# Altium PCB CorgPassRev1.PcbDoc (part 1 of 2)
Units mm, origin at the board's own origin, x right, y up, seen from the top; angles counter-clockwise.
Board outline 25 x 75 mm, 4 copper layers (Top Layer, Plane (GND), Plane (3V3), Bottom Layer), stack 1.57 mm thick; 40 components, 42 nets, 191 pads, 69 vias.
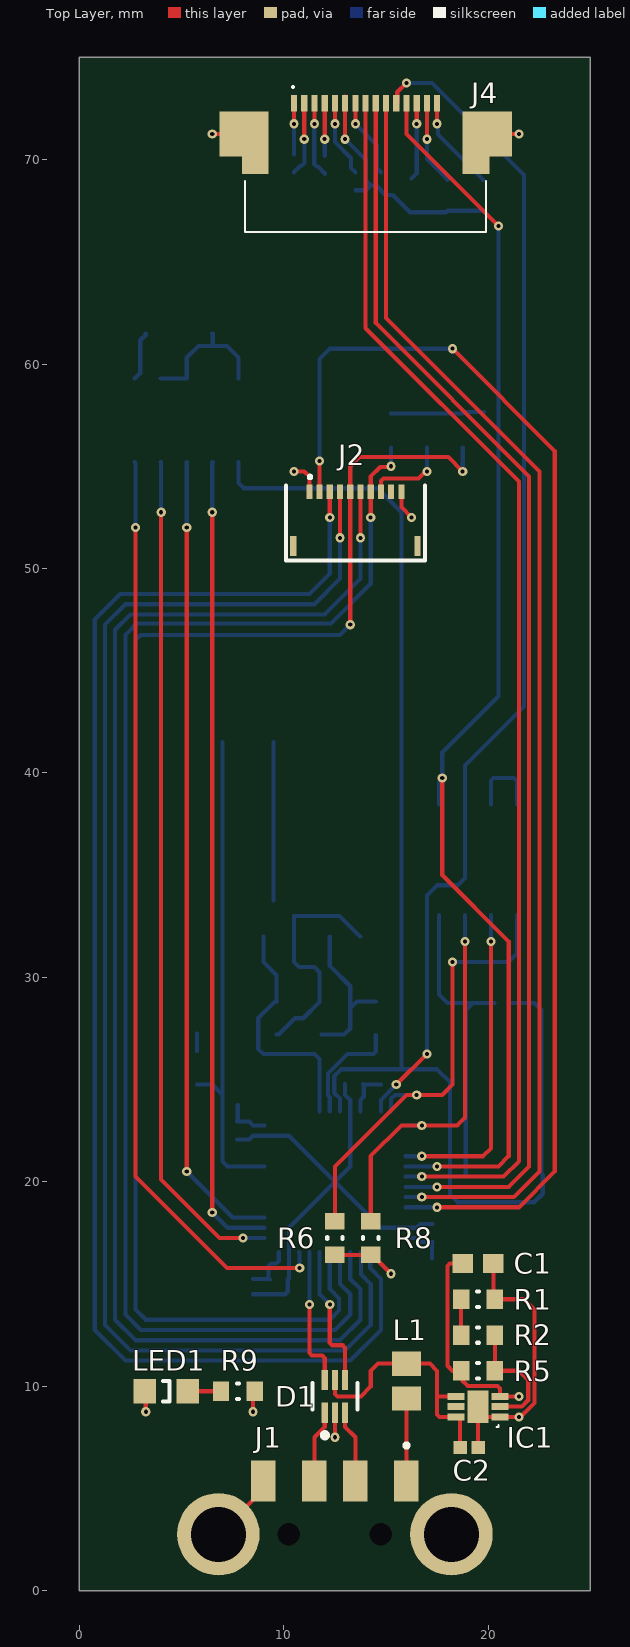
[diagram p0: Top Layer view]
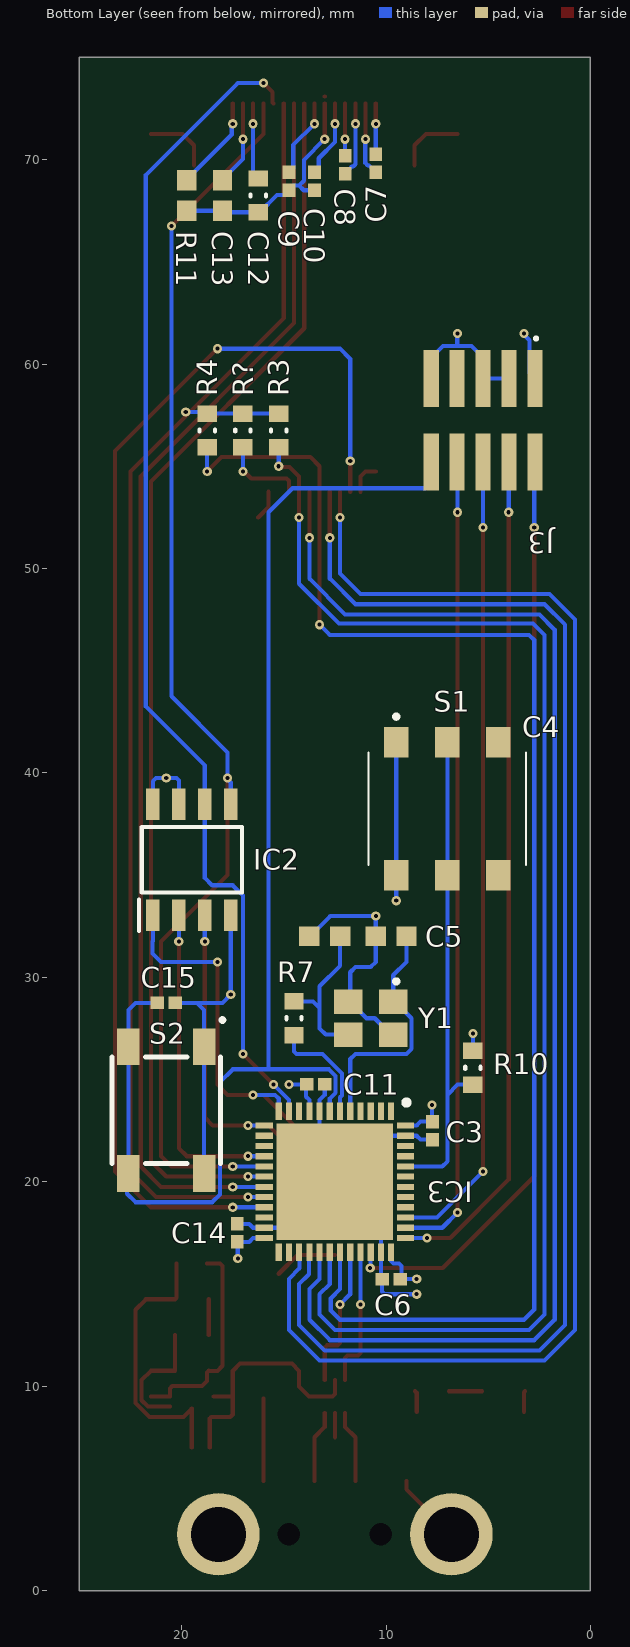
[diagram p1: Bottom Layer view, seen from below]
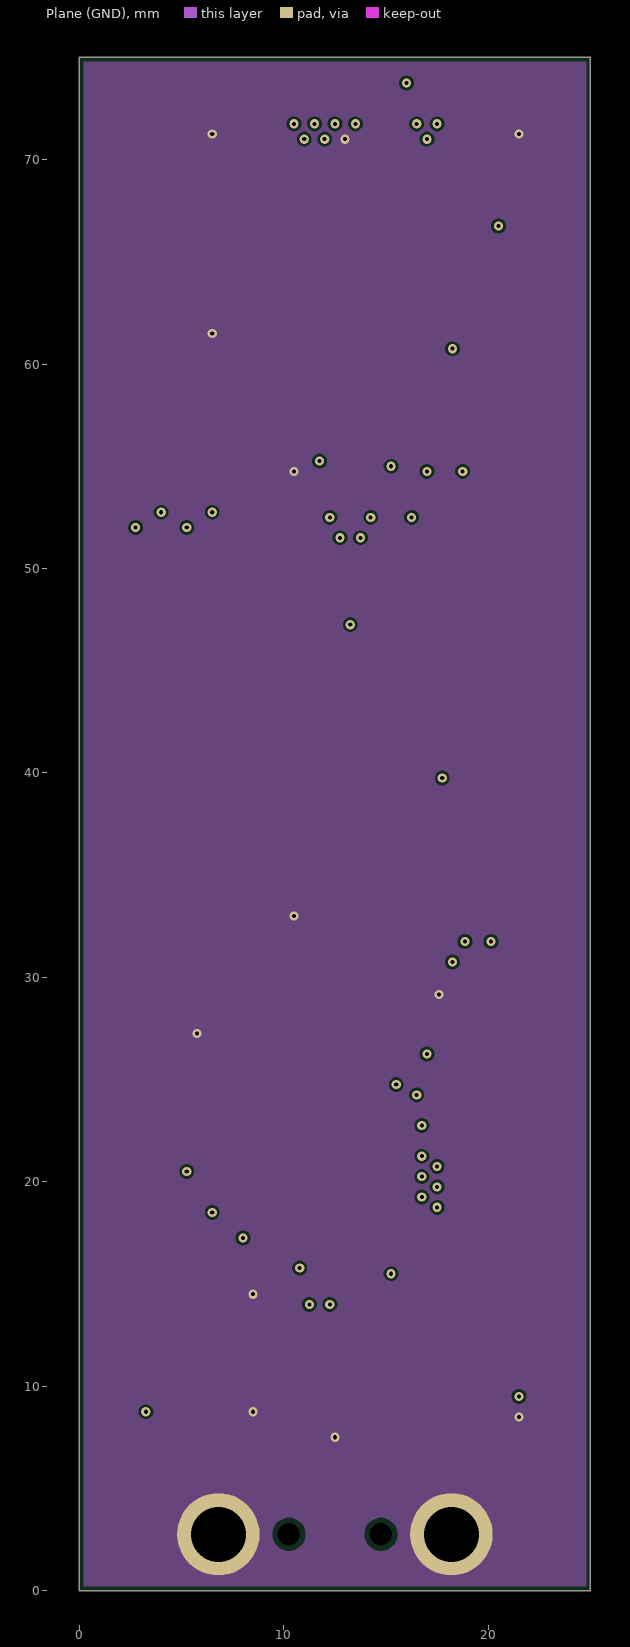
[diagram p2: Plane (GND)]
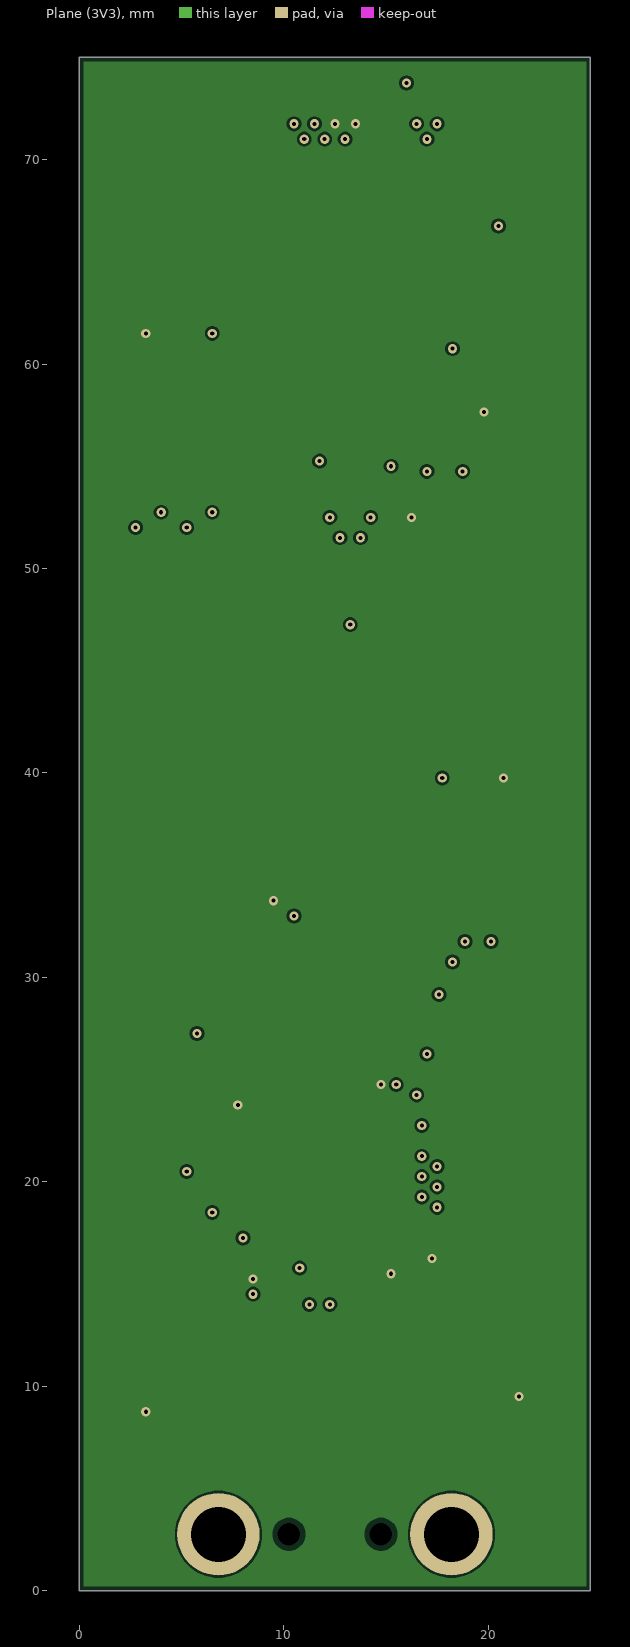
[diagram p3: Plane (3V3)]
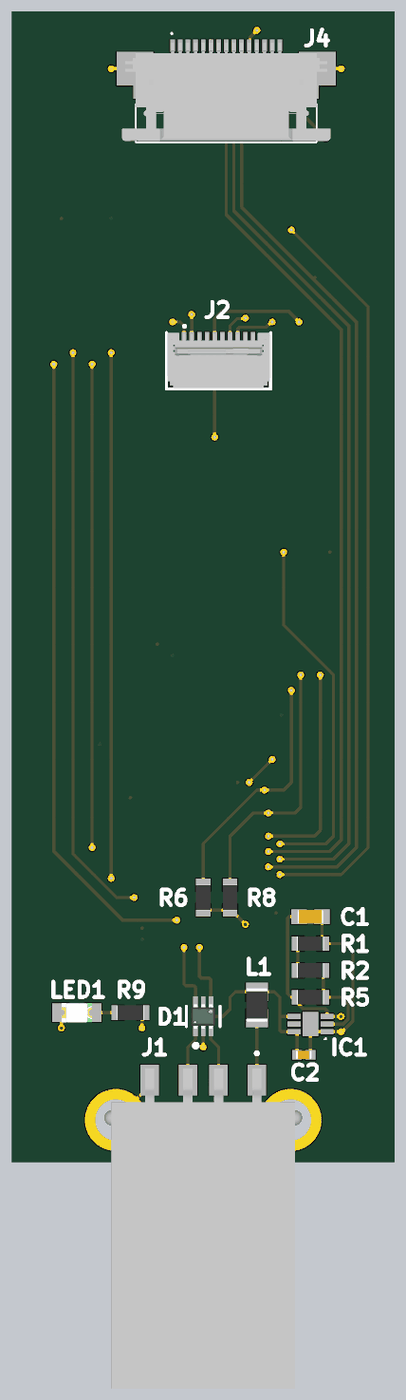
[diagram p4: 3D render of the assembled board from above, using the file's embedded part models]
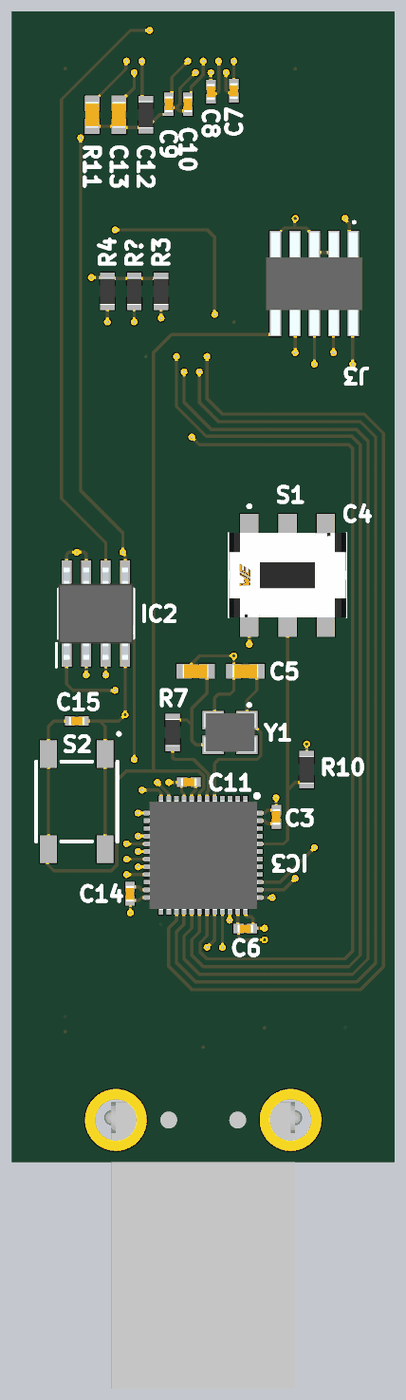
[diagram p5: 3D render of the assembled board from below, using the file's embedded part models]

## Layer stack, top to bottom
Top Solder: solder mask 0.0102, Solder Resist, Dk 3.5
Top Layer: signal copper 0.035
Dielectric 2: prepreg 0.2, PP-006, Dk 4.1
Plane (GND): signal copper 0.0175
Dielectric 1: dielectric 1.065, FR-4, Dk 4.8
Plane (3V3): signal copper 0.0175
Dielectric 3: prepreg 0.2, PP-006, Dk 4.1
Bottom Layer: signal copper 0.035
Bottom Solder: solder mask 0.0102, Solder Resist, Dk 3.5

## Board outline
0,0 25,0 25,75 0,75

## Design rules (kind name [scope] priority, off if disabled: settings)
BoardOutlineClearance [All] p1: gap=0.2 ignorepadtopadclearanceinfootprint=FALSE
Clearance [All] p1: gap=0.102 ignorepadtopadclearanceinfootprint=FALSE except(0.127: Arc-Via Track-Via SMDPad-Via THPad-Via Via-Via Via-Fill Via-Poly Via-Region Via-Text; 0.25: Arc-Hole Track-Hole SMDPad-Hole THPad-Hole Via-Hole Fill-Hole Poly-Hole Region-Hole Text-Hole)
ComponentClearance [All] p1: gap=0.102 collisioncheckmode=3 verticalgap=0.102 showdistances=TRUE
DiffPairsRouting [All] p1: maxlimit=0.102 minlimit=0.102 mostfreqgap=0.102 toplayer_minwidth=0.102 toplayer_maxwidth=1816.048 toplayer_prefwidth=0.102 midlayer1_minwidth=0.102 midlayer1_maxwidth=1816.048 midlayer1_prefwidth=0.102 midlayer2_minwidth=0.102 midlayer2_maxwidth=1816.048 midlayer2_prefwidth=0.102 bottomlayer_minwidth=0.102 bottomlayer_maxwidth=1816.048 bottomlayer_prefwidth=0.102 maxuncoupledlength=12.7
Height [All] p1: minheight=0 maxheight=1816.048 prefheight=12.7
HoleSize [All] p1: absolutevalues=TRUE maxlimit=6.3 minlimit=0.2 maxpercent=80.000 minpercent=20.000
HoleToHoleClearance [All] p1: gap=0.25 allowstackedmicrovias=FALSE
MinimumAnnularRing [All] p1: minimumring=0.076
MinimumSolderMaskSliver [All] p1: minsoldermaskwidth=0
PlaneClearance [All] p1: clearance=0.102
PlaneConnect PlaneConnect_3V3 [InNetClass('3V3')] p1: planeconnectstyle=Direct reliefexpansion=0.3 reliefentries=4 reliefconductorwidth=0.102 reliefairgap=0.102
PlaneConnect PlaneConnect_GND [InNetClass('GND')] p2: planeconnectstyle=Direct reliefexpansion=0.508 reliefentries=4 reliefconductorwidth=0.254 reliefairgap=0.254
PlaneConnect [All] p3: pad.planeconnectstyle=Relief pad.reliefexpansion=0.3 pad.reliefentries=4 pad.reliefconductorwidth=0.102 pad.reliefairgap=0.102 via.planeconnectstyle=Direct via.reliefexpansion=0.3 via.reliefentries=4 via.reliefconductorwidth=0.127 via.reliefairgap=0.127
PolygonConnect PolygonConnect_3V3 [All vs InNetClass('3V3')] p1: connectstyle=Direct reliefconductorwidth=0.254 reliefentries=4 polygonreliefangle="90 Angle" airgapwidth=0.254
PolygonConnect PolygonConnect_GND [All vs InNetClass('GND')] p2: connectstyle=Direct reliefconductorwidth=0.254 reliefentries=4 polygonreliefangle="90 Angle" airgapwidth=0.254
PolygonConnect [All] p3: thpad.connectstyle=Relief thpad.reliefconductorwidth=0.102 thpad.reliefentries=4 thpad.polygonreliefangle="90 Angle" thpad.airgapwidth=0.102 smdpad.connectstyle=Relief smdpad.reliefconductorwidth=0.102 smdpad.reliefentries=4 smdpad.polygonreliefangle="90 Angle" smdpad.airgapwidth=0.102 via.connectstyle=Direct via.reliefconductorwidth=0.127 via.reliefentries=4 via.polygonreliefangle="90 Angle" via.airgapwidth=0.127
RoutingVias [All] p1: holewidth=0.2 width=0.45 viastyle="Through Hole" minholewidth=0.2 minwidth=0.45 maxholewidth=6.3 maxwidth=6.55
SilkToSilkClearance [All] p1: silktosilkclearance=0
SilkToSolderMaskClearance [IsPad] p1: minsilkscreentomaskgap=0.102 clearancetoexposedcopper=TRUE
SolderMaskExpansion [All] p1: expansion=0.075 istentingtop=FALSE
Width [All] p1: maxlimit=1816.048 minlimit=0.102 preferedwidth=0.204 minimp=50.000000 maximp=50.000000 favimp=50.000000
20 further rules are at their usual default settings.

## Classes and differential pairs
net class GND: GND
net class 3V3: 3V3

## Components (designator, comment, footprint, x,y, rotation, side; value= is the part's Value field where it differs from the comment)
C1 "4.7uF" CL10A475KQ8NNNC 19.5,16 r0 top
C2 "Cap" CL05A105KQ5NNNC 19.06,7 r180 top value=1uF
C3 "Cap" CL05B104KQ5NNNC 7.723,22.5 r90 bottom value=100nF
C4 "Cap" CL10C120JB81PNC 13,32 r180 bottom value=12pF
C5 "Cap" CL10C120JB81PNC 9.75,32 r180 bottom value=12pF
C6 "Cap" CL05B104KQ5NNNC 9.75,15.223 r0 bottom value=100nF
C7 "Cap" CL05A105KQ5NNNC 10.5,69.81 r90 bottom value=1uF
C8 "Cap" CL05A105KQ5NNNC 12,69.75 r90 bottom value=1uF
C9 "Cap" CL05A105KQ5NNNC 14.75,68.94 r90 bottom value=1uF
C10 "Cap" CL05A105KQ5NNNC 13.5,68.94 r90 bottom value=1uF
C11 "Cap" CL05B104KQ5NNNC 13.44,24.777 r0 bottom value=100nF
C12 "Cap" CL10A225KA8NNNC 19.75,68.25 r90 bottom value=2.2uF
C13 "Cap" CL10A225KA8NNNC 18,68.25 r270 bottom value=2.2uF
C14 "Cap" CL05B104KQ5NNNC 17.277,17.5 r90 bottom value=100nF
C15 "Cap" CL05B104KQ5NNNC 20.75,28.75 r180 bottom value=100nF
D1 "USBLC6-2P6" FP-SOT-666-MFG 12.5,9.5 r90 top
IC1 "LDL212PVR" LDL212PVR 19.5,9 r180 top
IC2 "M95M04-DRMN6TP" SOIC127P600X175-8N 19.5,35.75 r90 bottom
IC3 "STM32L443CCU6" QFN50P700X700X60-49N-D 12.5,20 r270 bottom
J1 "1734028-1" 117340281 12.5,-4.5 r0 top
J2 "503480-1000" 5034801000 13.5,54.05 r0 top
J3 "FTSH-105-01-L-DV-K-TR" FTSH10501LDVKTR 5.25,57.25 r0 bottom
J4 "52745-1597" 527451597 14,72.75 r0 top
L1 "100MHz @ 600" 742792040 16,10.25 r270 top
LED1 "150080RS75000" 0805_A 4.25,9.75 r180 top
R1 "Res2" ERJ-UP3F20R0V 19.5,14.25 r0 top value=20
R2 "Res2" ERJ-UP3F1002V 19.5,12.5 r180 top value=10k
R3 "Res2" ERJ-UP3F1002V 15.25,56.75 r270 bottom value=10k
R4 "Res2" ERJ-UP3F1002V 18.75,56.75 r270 bottom value=10k
R5 "Res2" ERJ-UP3F1802V 19.5,10.752 r0 top value=18k
R6 "Res2" ERJ-UP3F1002V 12.5,17.25 r270 top value=10k
R7 "Res2" ERJ-UP3J470V 14.5,28 r270 bottom value=47
R8 "Res2" ERJ-UP3F1002V 14.25,17.25 r90 top value=10k
R9 "Res2" ERJ-UP3F1001V 7.75,9.75 r180 top value=1k
R10 "Res2" ERJ-UP3F1002V 5.75,25.575 r90 bottom value=10k
R11 "Res2" ERJ-UP3F3903V 16.25,68.25 r90 bottom value=390k
R? "Res2" ERJ-UP3F1002V 17,56.75 r270 bottom value=10k
S1 "452403012014" 452403012014 7,38.25 r180 bottom
S2 "SKQGAKE010" SKQGAKE010 20.75,23.5 r270 bottom
Y1 "NX3225SA-16.000000MHZ-T1" NX3225SA16000000MHZT1 10.75,28 r0 bottom

## Footprints (in the part's own frame and the unit in brackets; to place one, negate y for a bottom-side part, rotate by r counter-clockwise, add the part's x,y. Pads: shape width x height; smd on the part's side, far side on the other; paste and mask are expansions set on the pad)
0805_A [mm] "Chip LED, 2-Leads, Body 2.0x1.3mm, IPC Medium Density"
  rect 1.1x1.2 smd: 1(-1.05,0) 2(1.05,0)
  silkscreen extent -0.15,-0.5 0.15,0.5, body extent -1,-0.62 1,0.63, height 0.68
117340281 [mm]
  rect 1.2x2 smd: 1(3.5,9.855) 2(1,9.855) 3(-1,9.855) 4(-3.5,9.855)
  round 4.035 hole 2.69: MH1(-5.7,7.255) MH2(5.7,7.255)
  round 0.55 hole 1.1 unplated: MH3(-2.25,7.255) MH4(2.25,7.255)
  silkscreen extent 3.4,11.5 3.6,11.7, body extent -6.45,-10.25 6.45,10.6, height 3.21
527451597 [mm]
  rect 0.3x0.8 smd: 1(-3.5,0) 2(-3,0) 3(-2.5,0) 4(-2,0) 5(-1.5,0) 6(-1,0) 7(-0.5,0) 8(0,0) 9(0.5,0) 10(1,0) 11(1.5,0) 12(2,0) 13(2.5,0) 14(3,0) 15(3.5,0)
  rect 2.4x2.2 smd: AMP1(-5.95,-1.5) AMP2(5.95,-1.5)
  rect 1.3x0.85 smd: BMP1(-5.4,-3.025) BMP2(5.4,-3.025)
  silkscreen extent -5.9,-6.3 5.9,0.85, body extent -6.8,-6.2 6.8,0.2, height 2
742792040 [mm] "Chip Inductor, 2-Leads, Body 2.00x1.20mm, IPC Medium Density"
  rect 1.19x1.42 smd: 1(-0.855,0) 2(0.855,0)
  body extent -1.1,-0.7 1.1,0.7, height 0.9
5034801000 [mm]
  rect 0.3x0.7 smd: 1(-2.25,-0.3) 2(-1.75,-0.3) 3(-1.25,-0.3) 4(-0.75,-0.3) 5(-0.25,-0.3) 6(0.25,-0.3) 7(0.75,-0.3) 8(1.25,-0.3) 9(1.75,-0.3) 10(2.25,-0.3)
  rect 0.3x1 smd: 11(-3.04,-2.95) 12(3.04,-2.95)
  silkscreen extent -3.4,-3.66 3.4,0.48, body extent -3.35,-3.61 3.35,-0.01, height 1.88
452403012014 [mm]
  rect 1.2x1.5 smd: 1(-2.5,3.25) 2(0,3.25) 3(2.5,3.25) 4(-2.5,-3.25) 5(0,-3.25) 6(2.5,-3.25)
  silkscreen extent -3.85,-2.75 3.85,4.6, body extent -3.85,-2.75 3.85,2.75, height 3.2
CL05A105KQ5NNNC [mm] "Chip Capacitor, 2-Leads, Body 1.00x0.50mm, IPC Medium Density"
  rect 0.66x0.62 smd: 1(-0.44,0) 2(0.44,0)
  body extent -0.53,-0.28 0.53,0.28, height 0.55
CL05B104KQ5NNNC [mm] "Chip Capacitor, 2-Leads, Body 1.00x0.50mm, IPC Medium Density"
  rect 0.66x0.62 smd: 1(-0.44,0) 2(0.44,0)
  body extent -0.53,-0.28 0.53,0.28, height 0.55
CL10A225KA8NNNC [mm] "Chip Capacitor, 2-Leads, Body 1.60x0.80mm, IPC Medium Density"
  rect 1x0.95 smd: 1(-0.75,0) 2(0.75,0)
  body extent -0.85,-0.45 0.85,0.45, height 0.9
CL10A475KQ8NNNC [mm] "Chip Capacitor, 2-Leads, Body 1.60x0.80mm, IPC Medium Density"
  rect 1x0.95 smd: 1(-0.75,0) 2(0.75,0)
  body extent -0.85,-0.45 0.85,0.45, height 0.9
CL10C120JB81PNC [mm] "Chip Capacitor, 2-Leads, Body 1.60x0.80mm, IPC Medium Density"
  rect 1x0.95 smd: 1(-0.75,0) 2(0.75,0)
  body extent -0.85,-0.45 0.85,0.45, height 0.9
ERJ-UP3F20R0V [mm] "Chip Resistor, 2-Leads, Body 1.60x0.85mm, IPC Medium Density"
  rect 0.8x0.95 smd: 1(-0.825,0) 2(0.825,0)
  silkscreen extent -0.05,-0.38 0.05,0.38, body extent -0.87,-0.48 0.87,0.48, height 0.55
ERJ-UP3F1001V [mm] "Chip Resistor, 2-Leads, Body 1.60x0.85mm, IPC Medium Density"
  rect 0.8x0.95 smd: 1(-0.825,0) 2(0.825,0)
  silkscreen extent -0.05,-0.38 0.05,0.38, body extent -0.87,-0.48 0.87,0.48, height 0.55
ERJ-UP3F1002V [mm] "Chip Resistor, 2-Leads, Body 1.60x0.85mm, IPC Medium Density"
  rect 0.8x0.95 smd: 1(-0.825,0) 2(0.825,0)
  silkscreen extent -0.05,-0.38 0.05,0.38, body extent -0.87,-0.48 0.87,0.48, height 0.55
ERJ-UP3F1802V [mm] "Chip Resistor, 2-Leads, Body 1.60x0.85mm, IPC Medium Density"
  rect 0.8x0.95 smd: 1(-0.825,0) 2(0.825,0)
  silkscreen extent -0.05,-0.38 0.05,0.38, body extent -0.87,-0.48 0.87,0.48, height 0.55
ERJ-UP3F3903V [mm] "Chip Resistor, 2-Leads, Body 1.60x0.85mm, IPC Medium Density"
  rect 0.8x0.95 smd: 1(-0.825,0) 2(0.825,0)
  silkscreen extent -0.05,-0.38 0.05,0.38, body extent -0.87,-0.48 0.87,0.48, height 0.55
ERJ-UP3J470V [mm] "Chip Resistor, 2-Leads, Body 1.60x0.85mm, IPC Medium Density"
  rect 0.8x0.95 smd: 1(-0.825,0) 2(0.825,0)
  silkscreen extent -0.05,-0.38 0.05,0.38, body extent -0.87,-0.48 0.87,0.48, height 0.55
FP-SOT-666-MFG [mm]
  rect 0.99x0.3 smd paste+0 mask+0: 1(-0.805,0.5) 2(-0.805,0) 3(-0.805,-0.5) 4(0.805,-0.5) 5(0.805,0) 6(0.805,0.5)
  silkscreen extent -2.02,-1.1 0.65,1.1, body extent -1.4,-0.95 1.4,0.95, height 0.25
FTSH10501LDVKTR [mm]
  rect 0.74x2.79 smd: 1(-2.54,-2.035) 2(-2.54,2.035) 3(-1.27,-2.035) 4(-1.27,2.035) 5(0,-2.035) 6(0,2.035) 7(1.27,-2.035) 8(1.27,2.035) 9(2.54,-2.035) 10(2.54,2.035)
  silkscreen extent -2.64,-4.05 -2.54,-3.95, body extent -3.14,-3.36 3.14,3.36, height 6.15
LDL212PVR [mm]
  rect 0.85x0.35 smd: 1(-1.075,0.5) 2(-1.075,0) 3(-1.075,-0.5) 4(1.075,-0.5) 5(1.075,0) 6(1.075,0.5)
  rect 1.02x1.6 smd: 1(0,0)
  silkscreen extent -1,0.9 -0.9,1
NX3225SA16000000MHZT1 [mm]
  rect 1.4x1.2 smd: 1(-1.1,-0.8) 2(1.1,-0.8) 3(1.1,0.8) 4(-1.1,0.8)
  silkscreen extent -1.3,-1.85 -1.2,-1.75, body extent -1.68,-1.28 1.68,1.28, height 0.8
QFN50P700X700X60-49N-D [mm]
  rect 0.85x0.3 smd: 1(-3.45,2.75) 2(-3.45,2.25) 3(-3.45,1.75) 4(-3.45,1.25) 5(-3.45,0.75) 6(-3.45,0.25) 7(-3.45,-0.25) 8(-3.45,-0.75) 9(-3.45,-1.25) 10(-3.45,-1.75) 11(-3.45,-2.25) 12(-3.45,-2.75) 25(3.45,-2.75) 26(3.45,-2.25) 27(3.45,-1.75) 28(3.45,-1.25) 29(3.45,-0.75) 30(3.45,-0.25) 31(3.45,0.25) 32(3.45,0.75) 33(3.45,1.25) 34(3.45,1.75) 35(3.45,2.25) 36(3.45,2.75)
  rect 0.3x0.85 smd: 13(-2.75,-3.45) 14(-2.25,-3.45) 15(-1.75,-3.45) 16(-1.25,-3.45) 17(-0.75,-3.45) 18(-0.25,-3.45) 19(0.25,-3.45) 20(0.75,-3.45) 21(1.25,-3.45) 22(1.75,-3.45) 23(2.25,-3.45) 24(2.75,-3.45) 37(2.75,3.45) 38(2.25,3.45) 39(1.75,3.45) 40(1.25,3.45) 41(0.75,3.45) 42(0.25,3.45) 43(-0.25,3.45) 44(-0.75,3.45) 45(-1.25,3.45) 46(-1.75,3.45) 47(-2.25,3.45) 48(-2.75,3.45)
  rect 5.7x5.7 smd: 49(0,0)
  silkscreen extent -4,3.37 -3.75,3.62, body extent -3.55,-3.55 3.55,3.55, height 0.6
SKQGAKE010 [mm]
  rect 1.8x1.1 smd: 1(-3.1,1.85) 2(3.1,1.85) 3(-3.1,-1.85) 4(3.1,-1.85)
  silkscreen extent -4.47,-2.65 2.6,2.81
SOIC127P600X175-8N [mm]
  rect 1.525x0.65 smd: 1(-2.712,1.905) 2(-2.712,0.635) 3(-2.712,-0.635) 4(-2.712,-1.905) 5(2.712,-1.905) 6(2.712,-0.635) 7(2.712,0.635) 8(2.712,1.905)
  silkscreen extent -3.47,-2.45 1.6,2.58, body extent -3,-2.45 3,2.45, height 1.75

## Part data
C1: library part Cap, "Cap Ceramic 4.7uF 6.3V X5R 10% SMD 0603 85°C Paper T/R", Case Code (Imperial)=0603, Case Code (Metric)=1608, Dielectric=X5R, Manufacturer=Samsung, Manufacturer Part Number=CL10A475KQ8NNNC, Max Operating Temperature=85°C, Min Operating Temperature=-55°C, Package Quantity=1, Supplier Part Number 1=187-CL10A475KQ8NNNC, Tolerance=20%, Voltage=6.3V, Capacitance=4.7uF, Case/Package=0603, Category="Ceramic Capacitors", ComponentLink1Description=https://datasheet.ciiva.com/15195/getdatasheetpartid-358620-15195714.pdf?src-supplier=Verical, ComponentLink1URL=https://datasheet.ciiva.com/15195/getdatasheetpartid-358620-15195714.pdf?src-supplier=Verical, ComponentLink2Description=https://datasheet.ciiva.com/29198/457675-da-01-en-vs-kondensator-0603-29198672.pdf?src-supplier=Conrad, ComponentLink2URL=https://datasheet.ciiva.com/29198/457675-da-01-en-vs-kondensator-0603-29198672.pdf?src-supplier=Conrad, ComponentLink3Description=https://datasheet.ciiva.com/16437/cl05b104kq5nnnc-16437321.pdf?src-supplier=Future+Electronics, ComponentLink3URL=https://datasheet.ciiva.com/16437/cl05b104kq5nnnc-16437321.pdf?src-supplier=Future+Electronics, Construction=Flat, Contact Plating=Tin, Depth=0.8mm, Height=0.8mm, LatestRevisionDate=17-Jul-2002, LatestRevisionNote="Re-released for DXP Platform.", Length=1.6mm, Material=Ceramic, Mount="Surface Mount", PackageDescription="Radial Cap, Thru-Hole; 2 Leads; 0.3 in Pin Spacing", PackageReference=RAD-0.3, Packaging="Tape and Reel", Pricing 1="1=0.13000, 10=0.04700, 50=0.04700, 100=0.02100, 500=0.01500, 1000=0.01200, 4000=0.01000, 8000=0.00800, 10000=0.00800 (USD)", Published=8-Jun-2000, Publisher="Altium Limited", Radiation Hardening=No, RoHS=Yes, RoHS Compliant=Yes, Series=CL, Stock 1=199260, Supplier 1=Mouser, Thickness=0.035inch, Voltage Rating=6.3V, Width=0.031inch
C2 C7 C8 C9 C10: "Ceramic capacitor SMD-0402 1000nF /6.3V X5R# K +-10%, Samsung, RoHS", Capacitance=1uF, Case Code (Imperial)=0402, Case Code (Metric)=1005, Dielectric=X5R, Manufacturer=Samsung, Manufacturer Part Number=CL05A105KQ5NNNC, Max Operating Temperature=85°C, Min Operating Temperature=-55°C, Supplier Part Number 1=187-CL05A105KQ5NNNC, Tolerance=10%, Voltage=6.3V, Case/Package=0402, Category="Ceramic Capacitors", ComponentLink1Description=https://datasheet.ciiva.com/25709/cl05a105kq5nnnc-25709776.pdf?src-supplier=Digi-Key, ComponentLink1URL=https://datasheet.ciiva.com/25709/cl05a105kq5nnnc-25709776.pdf?src-supplier=Digi-Key, ComponentLink2Description=https://datasheet.ciiva.com/15195/getdatasheetpartid-358391-15195631.pdf?src-supplier=Verical, ComponentLink2URL=https://datasheet.ciiva.com/15195/getdatasheetpartid-358391-15195631.pdf?src-supplier=Verical, ComponentLink3Description=https://datasheet.ciiva.com/29198/459172-da-01-en-vs-kondensator-0402-29198343.pdf?src-supplier=Conrad, ComponentLink3URL=https://datasheet.ciiva.com/29198/459172-da-01-en-vs-kondensator-0402-29198343.pdf?src-supplier=Conrad, ComponentLink4Description=https://datasheet.ciiva.com/16339/cl05b104kq5nnnc-16339614.pdf?src-supplier=Future+Electronics, ComponentLink4URL=https://datasheet.ciiva.com/16339/cl05b104kq5nnnc-16339614.pdf?src-supplier=Future+Electronics, Construction=Flat, Depth=0.5mm, Height=0.5mm, LatestRevisionDate=17-Jul-2002, LatestRevisionNote="Re-released for DXP Platform.", Lead Free="Lead Free", Length=1mm, Material=Ceramic, Mount="Surface Mount", PackageDescription="Radial Cap, Thru-Hole; 2 Leads; 0.3 in Pin Spacing", PackageReference=RAD-0.3, Packaging="Tape and Reel", Pricing 1="1=0.10000, 10=0.01100, 50=0.01100, 100=0.00900, 500=0.00700, 1000=0.00500, 5000=0.00400, 10000=0.00300 (USD)", Published=8-Jun-2000, Publisher="Altium Limited", Radiation Hardening=No, RoHS=Yes, RoHS Compliant=Yes, Series=CL, Stock 1=1554203, Supplier 1=Mouser, Thickness=0.022inch, Voltage Rating=6.3V, Voltage Rating (DC)=6.3V, Width=0.02inch
C3 C6 C11 C14 C15: "Cap Ceramic 0.1uF 6.3V X7R 10% SMD 0402 125°C Paper T/R", Capacitance=100nF, Case Code (Imperial)=0402, Case Code (Metric)=1005, Dielectric=X7R, Manufacturer=Samsung, Manufacturer Part Number=CL05B104KQ5NNNC, Max Operating Temperature=125°C, Min Operating Temperature=-55°C, Supplier Part Number 1=187-CL05B104KQ5NNNC, Tolerance=10%, Voltage Rating=6.3V, Case/Package=0402, Category="Ceramic Capacitors", ComponentLink1Description=https://datasheet.ciiva.com/25709/cl05b104kq5nnnc-25709268.pdf?src-supplier=Digi-Key, ComponentLink1URL=https://datasheet.ciiva.com/25709/cl05b104kq5nnnc-25709268.pdf?src-supplier=Digi-Key, ComponentLink2Description=https://datasheet.ciiva.com/26838/getdatasheetpartid-494330-26838215.pdf?src-supplier=Verical, ComponentLink2URL=https://datasheet.ciiva.com/26838/getdatasheetpartid-494330-26838215.pdf?src-supplier=Verical, ComponentLink3Description=https://datasheet.ciiva.com/16498/cl05b104kq5nnnc-16498492.pdf?src-supplier=Future+Electronics, ComponentLink3URL=https://datasheet.ciiva.com/16498/cl05b104kq5nnnc-16498492.pdf?src-supplier=Future+Electronics, Depth=0.5mm, Height=0.5mm, LatestRevisionDate=17-Jul-2002, LatestRevisionNote="Re-released for DXP Platform.", Lead Free="Lead Free", Length=1mm, Mount="Surface Mount", PackageDescription="Radial Cap, Thru-Hole; 2 Leads; 0.3 in Pin Spacing", PackageReference=RAD-0.3, Packaging="Tape and Reel", Pricing 1="1=0.10000, 10=0.01400, 50=0.01400, 100=0.01200, 1000=0.00700, 10000=0.00400 (USD)", Published=8-Jun-2000, Publisher="Altium Limited", Radiation Hardening=No, RoHS=Yes, Stock 1=56542, Supplier 1=Mouser, Thickness=0.022inch, Voltage Rating (DC)=6.3V, Width=0.02inch
C4 C5: "Cap Ceramic 12pF 50V C0G 5% SMD 0603 125C Automotive Cardboard T/R", Capacitance=12pF, Case Code (Imperial)=0603, Case Code (Metric)=1608, Dielectric=C0G, Manufacturer=Samsung, Manufacturer Part Number=CL10C120JB81PNC, Max Operating Temperature=125°C, Min Operating Temperature=-55°C, Package Quantity=4000, Ratings=AEC-Q200, Supplier Part Number 1=187-CL10C120JB81PNC, Temperature Coefficient=300ppm/°C, Tolerance=5%, Voltage=50V, Case/Package=0603, Category="Ceramic Capacitors", ComponentLink1Description=https://datasheet.ciiva.com/15195/getdatasheetpartid-494032-15195793.pdf?src-supplier=Verical, ComponentLink1URL=https://datasheet.ciiva.com/15195/getdatasheetpartid-494032-15195793.pdf?src-supplier=Verical, ComponentLink2Description=https://datasheet.ciiva.com/16437/cl10c120jb81pnc-16437304.pdf?src-supplier=Future+Electronics, ComponentLink2URL=https://datasheet.ciiva.com/16437/cl10c120jb81pnc-16437304.pdf?src-supplier=Future+Electronics, Depth=0.8mm, Height=0.8mm, LatestRevisionDate=17-Jul-2002, LatestRevisionNote="Re-released for DXP Platform.", Lead Free="Lead Free", Length=1.6mm, Mount="Surface Mount", PackageDescription="Radial Cap, Thru-Hole; 2 Leads; 0.3 in Pin Spacing", PackageReference=RAD-0.3, Packaging="Tape and Reel", Pricing 1="1=0.11000, 10=0.05000, 50=0.05000, 100=0.02300, 1000=0.01300, 10000=0.00800 (USD)", Published=8-Jun-2000, Publisher="Altium Limited", Radiation Hardening=No, RoHS=Yes, Stock 1=33780, Supplier 1=Mouser, Thickness=0.035inch, Voltage Rating=50V, Width=0.031inch
C12 C13: "Ceramic capacitor SMD-0603 2200nF/25V X5R# K +-10%, SAMSUNG, RoHS", Capacitance=2.2uF, Case Code (Imperial)=0603, Case Code (Metric)=1608, Dielectric=X5R, Manufacturer=Samsung, Manufacturer Part Number=CL10A225KA8NNNC, Max Operating Temperature=85°C, Min Operating Temperature=-55°C, Package Quantity=1, Supplier Part Number 1=187-CL10A225KA8NNNC, Tolerance=10%, Voltage Rating=25V, Case/Package=0603, Category="Ceramic Capacitors", ComponentLink1Description=https://datasheet.ciiva.com/25797/cl10a225ka8nnnc-25797781.pdf?src-supplier=Digi-Key, ComponentLink1URL=https://datasheet.ciiva.com/25797/cl10a225ka8nnnc-25797781.pdf?src-supplier=Digi-Key, Construction=Flat, Depth=0.8mm, Height=0.8mm, LatestRevisionDate=17-Jul-2002, LatestRevisionNote="Re-released for DXP Platform.", Lead Free="Lead Free", Length=1.6mm, Mount="Surface Mount", PackageDescription="Radial Cap, Thru-Hole; 2 Leads; 0.3 in Pin Spacing", PackageReference=RAD-0.3, Packaging="Tape and Reel", Pricing 1="1=0.22000, 10=0.09000, 50=0.09000, 100=0.07700, 500=0.05300, 1000=0.04700, 4000=0.04000, 8000=0.03800, 10000=0.03800 (USD)", Published=8-Jun-2000, Publisher="Altium Limited", Radiation Hardening=No, RoHS=Yes, RoHS Compliant=Yes, Series=CL, Stock 1=114346, Supplier 1=Mouser, Thickness=0.035inch, Voltage Rating (DC)=25V, Width=0.031inch
D1: library part CMP-12225-000058-1, "TVS DIODE 5.25V 17V SOT666", Breakdown Voltage=6V, Capacitance=3.5pF, Case/Package=SOT-666, Clamping Voltage=17V, Leakage Current=150nA, Manufacturer=STMicroelectronics, Max Operating Temperature=125°C, Min Operating Temperature=-40°C, Operating Supply Voltage=5V, Package Quantity=1, Peak Pulse Current=5A, Power Line Protection=Yes, Supplier Part Number 1=511-USBLC6-2P6, Test Current=1mA, Category="TVS Diodes", Clamping Voltage-Max=17V, ComponentLink1Description=https://datasheet.ciiva.com/14186/usblc6-2-st-eng-tds-14186568.pdf?src-supplier=Distrelec, ComponentLink1URL=https://datasheet.ciiva.com/14186/usblc6-2-st-eng-tds-14186568.pdf?src-supplier=Distrelec, ComponentLink2Description=https://datasheet.ciiva.com/22685/1690354-22685832.pdf?src-supplier=Element14, ComponentLink2URL=https://datasheet.ciiva.com/22685/1690354-22685832.pdf?src-supplier=Element14, ComponentLink3Description=https://datasheet.ciiva.com/22692/1690354-22692453.pdf?src-supplier=Element14, ComponentLink3URL=https://datasheet.ciiva.com/22692/1690354-22692453.pdf?src-supplier=Element14, ComponentLink4Description=https://datasheet.ciiva.com/4508/cd00050750-4508892.pdf?src-supplier=Mouser, ComponentLink4URL=https://datasheet.ciiva.com/4508/cd00050750-4508892.pdf?src-supplier=Mouser, ComponentLink5Description=https://datasheet.ciiva.com/16378/cd00050750-16378714.pdf?src-supplier=Future+Electronics, ComponentLink5URL=https://datasheet.ciiva.com/16378/cd00050750-16378714.pdf?src-supplier=Future+Electronics, ComponentLink6Description=https://datasheet.ciiva.com/41444/001184108-da-01-en-ic-esd-protection-usblc6-2p6-sot-666-stm-41444134.pdf?src-supplier=Conrad, ComponentLink6URL=https://datasheet.ciiva.com/41444/001184108-da-01-en-ic-esd-protection-usblc6-2p6-sot-666-stm-41444134.pdf?src-supplier=Conrad, Contact Plating=Tin, Depth=1.3mm, Direction=Unidirectional, Element Configuration=Dual, ESD Protection=Yes, Height=0.6mm, Lead Free="Lead Free", Length=1.7mm, Manufacturer Part Number=USBLC6-2P6, Max Breakdown Voltage=6V, Max Reverse Leakage Current=150nA, Min Breakdown Voltage=6V, Mount="Surface Mount", Number of Bidirectional Channels=2, Number of Channels=2, Number of Elements=1, Number of Pins=6, Packaging="Tape and Reel", Polarity=Unidirectional, Pricing 1="1=0.65000, 10=0.55700, 50=0.55700, 100=0.41600, 500=0.32700, 1000=0.25300, 3000=0.23000, 10000=0.23000 (USD)", Radiation Hardening=No, REACH SVHC="No SVHC", Reverse Breakdown Voltage=6V, Reverse Standoff Voltage=5V, RoHS=Yes, RoHS Compliant=Yes, Series=USB, Supplier 1=Mouser, Termination=SMD/SMT, Width=1.3mm, Working Voltage=5V
IC1: "LDL212 Series 18 V 1.2 A Adj. High PSRR Low Drop Linear Regulator IC - DFN-6", Dropout Voltage=350mV, Manufacturer=STMicroelectronics, Max Operating Temperature=125°C, Min Operating Temperature=-40°C, Output Current=1.2A, Output Voltage=17.65V, Supplier Part Number 1=511-LDL212PVR, Category="Voltage Regulators - Linear", ComponentLink1Description=http://www.mouser.com/ds/2/389/ldl212-974162.pdf?src-supplier=Mouser, ComponentLink1URL=http://www.mouser.com/ds/2/389/ldl212-974162.pdf?src-supplier=Mouser, ComponentLink2Description=http://www.st.com/content/ccc/resource/sales_and_marketing/promotional_material/brochure/group0/cb/7a/af/56/f7/bd/47/e9/Brochure%20Power%20management%20guide/files/Brochure_Power_Management.pdf/jcr:content/translations/en.Brochure_Power_Management.pdf?src-supplier=Digi-Key, ComponentLink2URL=http://www.st.com/content/ccc/resource/sales_and_marketing/promotional_material/brochure/group0/cb/7a/af/56/f7/bd/47/e9/Brochure%20Power%20management%20guide/files/Brochure_Power_Management.pdf/jcr:content/translations/en.Brochure_Power_Management.pdf?src-supplier=Digi-Key, Manufacturer Part Number=LDL212PVR, Number of Regulators=1, Pricing 1="1=0.63000, 10=0.50200, 50=0.50200, 100=0.37300, 500=0.31500, 1000=0.24400, 3000=0.22100, 6000=0.21600, 10000=0.21600 (USD)", RoHS=Yes, RoHS Compliant=Yes, Supplier 1=Mouser
IC2: "EEPROM Spi 4MBIT 512K X 8 1.8V to 5.5V 8-PIN SOIC T/r", Manufacturer=STMicroelectronics, Supplier Part Number 1=511-M95M04-DRMN6TP, Category=Memory, Datasheet Link=https://componentsearchengine.com/Datasheets/1/M95M04-DRMN6TP.pdf, Height=1.75mm, Manufacturer Part Number=M95M04-DRMN6TP, Manufacturer_Name=STMicroelectronics, Manufacturer_Part_Number=M95M04-DRMN6TP, Pricing 1="1=3.16000, 10=2.80000, 50=2.80000, 100=2.50000, 1000=2.29000, 10000=2.28000 (USD)", RoHS=Yes, Stock 1=1275, Supplier 1=Mouser
IC3: "Ultra-low-power with FPU ARM Cortex-M4 MCU 80 MHz with 256 Kbytes Flash, LCD, USB, AES-256", Case/Package=UFQFPN, Frequency=80MHz, Manufacturer=STMicroelectronics, Max Operating Temperature=85°C, Min Operating Temperature=-40°C, Mouser2 Part Number=511-STM32L443CCU6, Category=Microcontrollers, ComponentLink1Description=http://www.st.com/content/ccc/resource/technical/document/datasheet/01/76/9c/b5/c7/d9/40/6c/DM00254865.pdf/files/DM00254865.pdf/jcr:content/translations/en.DM00254865.pdf?src-supplier=Digi-Key, ComponentLink1URL=http://www.st.com/content/ccc/resource/technical/document/datasheet/01/76/9c/b5/c7/d9/40/6c/DM00254865.pdf/files/DM00254865.pdf/jcr:content/translations/en.DM00254865.pdf?src-supplier=Digi-Key, Core Architecture=ARM, Datasheet Link=https://componentsearchengine.com//STM32L443CCU6.pdf, Height=0.6mm, Interface=I2C,SPI,USB,IrDA,MMC,SD,UART,USART, Manufacturer Part Number=STM32L443CCU6, Manufacturer_Name=STMicroelectronics, Manufacturer_Part_Number=STM32L443CCU6, Memory Size=256KB, Memory Type=FLASH, Mouser2 Price/Stock=https://www.mouser.com/Search/Refine.aspx?Keyword=511-STM32L443CCU6, Number of I/Os=38, Number of Pins=48, Oscillator Type=Internal, Packaging=Tray, Peripherals="Brown-out Detect/Reset,PWM,WDT,DMA,LCD", Pricing 1="1=7.24000, 10=6.55000, 25=6.25000, 50=6.25000, 100=5.43000, 250=5.18000, 500=4.73000, 1000=4.07000, 2500=4.06000, 10000=4.07000 (USD)", RoHS=Yes, Stock 1=40, Supplier 1=Mouser, Supplier Part Number 1=511-STM32L443CCU6
J1: library part 1-1734028-1, "Conn USB 2.0 Type A PL 4 POS Solder RA Edge Mount 4 Terminal 1 Port Tray", Color=Natural, Contact Current Rating=1.5A, Flammability Rating="UL94 V-0", Manufacturer="TE Connectivity", Max Operating Temperature=185°C, Max Voltage Rating (AC)=30V, Min Operating Temperature=-67°C, Package Quantity=3200, Supplier Part Number 1=571-1734028-1, Category="Audio / Video Connectors", Circuit Application=Signal, ComponentLink1Description=https://datasheet.ciiva.com/3094/eng-ds-1-1773453-6-0908-3094652.pdf?src-supplier=Avnet, ComponentLink1URL=https://datasheet.ciiva.com/3094/eng-ds-1-1773453-6-0908-3094652.pdf?src-supplier=Avnet, ComponentLink2Description=https://datasheet.ciiva.com/851/eng-cd-1734028-c-851585.pdf?src-supplier=Digi-Key, ComponentLink2URL=https://datasheet.ciiva.com/851/eng-cd-1734028-c-851585.pdf?src-supplier=Digi-Key, ComponentLink3Description=https://datasheet.ciiva.com/16313/tyco201734028-1-16313266.pdf?src-supplier=Future+Electronics, ComponentLink3URL=https://datasheet.ciiva.com/16313/tyco201734028-1-16313266.pdf?src-supplier=Future+Electronics, ComponentLink4Description=https://datasheet.ciiva.com/16668/eng-ds-1-1773453-6-0908-16668521.pdf?src-supplier=Avnet+Europe, ComponentLink4URL=https://datasheet.ciiva.com/16668/eng-ds-1-1773453-6-0908-16668521.pdf?src-supplier=Avnet+Europe, Connector System=Cable-to-Board, Connector Type=Plug, Contact Material=Brass, Contact Plating=Gold, Depth=19.65mm, ELV=Compliant, Gender=Female, Housing Color=Natural, Housing Material=Thermoplastic, Lead Free="Lead Free", Length=12mm, Manufacturer Part Number=1734028-1, Mount="Surface Mount,Horizontal,Edge", Name=1734028-1, Number of Contacts=4, Number of Ports=1, Number of Positions=4, Number of Terminals/Pins=4, Orientation="Right Angle", Packaging="Tape and Reel", PCB Thickness=1.6mm, Pitch=2.5mm, Plating=Copper, Plating Thickness=0.76um, Pricing 1="1=1.51000, 10=1.19000, 50=1.19000, 100=0.99100, 500=0.85000, 1000=0.79500, 2500=0.74400, 5000=0.72100, 9600=0.70000, 10000=0.70000, 25600=0.64500 (USD)", Radiation Hardening=No, RoHS=Yes, Stock 1=6449, Supplier 1=Mouser, Termination=SMD/SMT
J2: "FPC/FFC 间距0.5mm 10pin 前插后压 H=1.0mm", Current Rating=500mA, Flammability Rating="UL94 V-0", Housing Color=White, Manufacturer=Molex, Max Operating Temperature=85°C, Max Voltage Rating (AC)=50V, Min Operating Temperature=-40°C, Mouser2 Part Number=538-503480-1000, Package Quantity=1, Actuator Material=Nylon,Glass,Polyamide, Category="FFC / FPC", ComponentLink1Description=https://datasheet.ciiva.com/5137/5034801000-ffc-fpc-connectors-179433-5137762.pdf?src-supplier=Mouser, ComponentLink1URL=https://datasheet.ciiva.com/5137/5034801000-ffc-fpc-connectors-179433-5137762.pdf?src-supplier=Mouser, ComponentLink2Description=https://datasheet.ciiva.com/26916/getdatasheetpartid-735332-26916946.pdf?src-supplier=Verical, ComponentLink2URL=https://datasheet.ciiva.com/26916/getdatasheetpartid-735332-26916946.pdf?src-supplier=Verical, ComponentLink3Description=https://datasheet.ciiva.com/16658/5034801000-ffc-fpc-connectors-16658884.pdf?src-supplier=Avnet+Europe, ComponentLink3URL=https://datasheet.ciiva.com/16658/5034801000-ffc-fpc-connectors-16658884.pdf?src-supplier=Avnet+Europe, ComponentLink4Description=https://datasheet.ciiva.com/671/5034801000-sd-671179.pdf?src-supplier=Digi-Key, ComponentLink4URL=https://datasheet.ciiva.com/671/5034801000-sd-671179.pdf?src-supplier=Digi-Key, Contact Material=Bronze, Contact Plating=Gold, Datasheet Link=https://componentsearchengine.com//503480-1000.pdf, Depth=3.6mm, ELV=Compliant, Gender=Receptacle, Halogen Free="Low Halogen", Housing Material=Polymer, Length=6.7mm, Manufacturer Part Number=503480-1000, Manufacturer_Name=Molex, Manufacturer_Part_Number=503480-1000, Material=Bronze, Mating Cycles=10, Max Voltage Rating (DC)=50V, Mouser2 Price/Stock=https://www.mouser.com/Search/Refine.aspx?Keyword=538-503480-1000, Number of Circuits=10, Number of Contacts=10, Number of Positions=10, Number of Rows=1, Orientation="Right Angle", Packaging="Tape and Reel", Pitch=0.5mm, Pricing 1="1=1.41000, 10=1.20000, 50=1.20000, 100=0.99000, 500=0.91200, 1000=0.78200, 3000=0.72900, 6000=0.69200, 9000=0.67600, 10000=0.67600, 24000=0.65100 (USD)", Radiation Hardening=No, REACH SVHC=Unknown, RoHS=Yes, Stackable=No, Stock 1=13096, Supplier 1=Mouser, Supplier Part Number 1=538-503480-1000, Termination=Solder, Voltage Rating=50V, Voltage Rating (AC)=50V, Wire/Cable Type=Straight
J3: "Conn Unshrouded Header HDR 10 POS 1.27mm Solder ST Top Entry SMD T/R", Color=Black, Current Rating=1.75A, Manufacturer=Samtec, Max Operating Temperature=125°C, Min Operating Temperature=-55°C, Package Quantity=550, Supplier Part Number 1=200-FTSH10501LDVKTR, Category="Headers and Wire Housings", ComponentLink1Description=https://datasheet.ciiva.com/23735/81359-23735917.pdf?src-supplier=Newark, ComponentLink1URL=https://datasheet.ciiva.com/23735/81359-23735917.pdf?src-supplier=Newark, ComponentLink2Description=https://datasheet.ciiva.com/10245/ftsh-mt-10245289.pdf?src-supplier=Avnet, ComponentLink2URL=https://datasheet.ciiva.com/10245/ftsh-mt-10245289.pdf?src-supplier=Avnet, ComponentLink3Description=https://datasheet.ciiva.com/739/ftsh-1xx-xx-xxx-dv-xxx-mkt-739005.pdf?src-supplier=Digi-Key, ComponentLink3URL=https://datasheet.ciiva.com/739/ftsh-1xx-xx-xxx-dv-xxx-mkt-739005.pdf?src-supplier=Digi-Key, Connector Type="Male Pin", Contact Material=Bronze, Contact Mating Length=0.12inch, Contact Plating=Gold, Contact Type="Male Pin", Depth=3.43mm, Gender=Male, Housing Color=Black, Housing Material=Polymer, Lead Free="Lead Free", Length=6.35mm, Manufacturer Part Number=FTSH-105-01-L-DV-K-TR, Max Current Rating=1.75A, Mount="Surface Mount", Number of Contacts=10, Number of Positions=10, Number of Rows=2, Orientation=Straight, Packaging="Tape and Reel", Pitch=1.27mm, Pricing 1="1=4.22000, 10=4.06000, 50=4.06000, 100=3.38000, 550=2.88000, 1000=2.88000, 1100=2.45000, 2200=2.24000, 4950=2.19000, 9900=2.14000, 10000=2.24000 (USD)", Radiation Hardening=No, REACH SVHC="No SVHC", RoHS=Yes, RoHS Compliant=Yes, Row Spacing=0.05inch, Series=FTSH, Stock 1=8719, Supplier 1=Mouser, Termination=Solder
J4: "Easy-On FFC/FPC Connector, 0.50mm Pitch, Slider Series, Right-Angle, Top Contact, 2.00mm Height, 15 Circuits, Gold...", Current Rating=500mA, Flammability Rating="UL94 V-0", Manufacturer=Molex, Package Quantity=1000, Supplier Part Number 1=538-52745-1597, Voltage Rating=50V, Category="FFC / FPC", ComponentLink1Description=https://datasheet.ciiva.com/5137/0527451597-ffc-fpc-connectors-170644-5137506.pdf?src-supplier=Mouser, ComponentLink1URL=https://datasheet.ciiva.com/5137/0527451597-ffc-fpc-connectors-170644-5137506.pdf?src-supplier=Mouser, ComponentLink2Description=https://datasheet.ciiva.com/16660/0527451597-ffc-fpc-connectors-16660188.pdf?src-supplier=Avnet+Europe, ComponentLink2URL=https://datasheet.ciiva.com/16660/0527451597-ffc-fpc-connectors-16660188.pdf?src-supplier=Avnet+Europe, ComponentLink3Description=https://datasheet.ciiva.com/10364/0527451597-ffc-fpc-connectors-10364286.pdf?src-supplier=Avnet, ComponentLink3URL=https://datasheet.ciiva.com/10364/0527451597-ffc-fpc-connectors-10364286.pdf?src-supplier=Avnet, Contact Material=Bronze, Contact Plating=Gold, Datasheet Link=https://www.molex.com/pdm_docs/sd/527451597_sd.pdf, ELV=Compliant, Gender=Receptacle, Height=2.2mm, Manufacturer Part Number=52745-1597, Manufacturer_Name=Molex, Manufacturer_Part_Number=52745-1597, Material=Bronze, Number of Circuits=15, Number of Contacts=15, Number of Positions=15, Number of Rows=1, Orientation="Right Angle", Packaging="Tape and Reel", Pitch=0.5mm, Pricing 1="1=2.22000, 10=1.90000, 50=1.90000, 100=1.57000, 500=1.45000, 1000=1.23000, 2000=1.15000, 5000=1.09000, 10000=1.07000, 25000=1.03000 (USD)", Radiation Hardening=No, REACH SVHC=Unknown, RoHS=Yes, RoHS Compliant=Yes, Series=52745, Stackable=No, Stock 1=12092, Supplier 1=Mouser, Termination=SMD/SMT
L1: library part Inductor, "Ferrite SMD Construction form: 0805 DC resistance: 0.15 Ohm Impedance @ 100 MHz: 600 Ohm", Case Code (Imperial)=0805, Case Code (Metric)=2012, Case/Package=SMD/SMT, Current Rating=2A, DC Resistance (DCR)=150mR, Inductance=5.6H, Manufacturer="Wurth Electronics", Manufacturer Part Number=742792040, Max Operating Temperature=125°C, Min Operating Temperature=-55°C, Package Quantity=1, Supplier Part Number 1=710-742792040, Test Frequency=100MHz, Tolerance=25%, Category="Ferrite Beads and Chips", Code_IEC=1005, Code_JEITA=0402, ComponentLink1Description=https://datasheet.ciiva.com/1560/742792040-1560864.pdf?src-supplier=Newark, ComponentLink1URL=https://datasheet.ciiva.com/1560/742792040-1560864.pdf?src-supplier=Newark, ComponentLink2Description=https://datasheet.ciiva.com/1013/742792040-1013539.pdf?src-supplier=Digi-Key, ComponentLink2URL=https://datasheet.ciiva.com/1013/742792040-1013539.pdf?src-supplier=Digi-Key, ComponentLink3Description=https://datasheet.ciiva.com/11799/0900766b80d2dd7f-11799667.pdf?src-supplier=RSComponents, ComponentLink3URL=https://datasheet.ciiva.com/11799/0900766b80d2dd7f-11799667.pdf?src-supplier=RSComponents, ComponentLink4Description=https://datasheet.ciiva.com/22711/1756153-22711349.pdf?src-supplier=Element14, ComponentLink4URL=https://datasheet.ciiva.com/22711/1756153-22711349.pdf?src-supplier=Element14, ComponentLink5Description=https://datasheet.ciiva.com/4940/742792040-80980-4940454.pdf?src-supplier=Mouser, ComponentLink5URL=https://datasheet.ciiva.com/4940/742792040-80980-4940454.pdf?src-supplier=Mouser, ComponentLink6Description=https://datasheet.ciiva.com/1013/742792040-1013540.pdf?src-supplier=Digi-Key, ComponentLink6URL=https://datasheet.ciiva.com/1013/742792040-1013540.pdf?src-supplier=Digi-Key, ComponentLink7Description=https://datasheet.ciiva.com/1013/742792040-1013541.pdf?src-supplier=Digi-Key, ComponentLink7URL=https://datasheet.ciiva.com/1013/742792040-1013541.pdf?src-supplier=Digi-Key, ComponentLink8Description=https://datasheet.ciiva.com/1126/1756153-1126571.pdf?src-supplier=Element14, ComponentLink8URL=https://datasheet.ciiva.com/1126/1756153-1126571.pdf?src-supplier=Element14, Core Material=Ferrite, Depth=1.2mm, Height=0.9mm, Impedance=600R, LatestRevisionDate=29-May-2009, LatestRevisionNote="IPC-7351 Footprint Added.", Lead Free="Lead Free", Length=2mm, Material=Ferrite, Max Current Rating=2A, Max DC Current=2A, Mount="Surface Mount", Number of Lines=1, PackageDescription="Chip Inductor", PackageReference=0402-A, Packaging="Tape and Reel", Pricing 1="1=0.22000, 10=0.22000, 50=0.21700, 100=0.21700, 500=0.21400, 1000=0.20800, 2000=0.20100, 4000=0.16100, 10000=0.16100 (USD)", Published=8-Jun-2000, Publisher="Altium Limited", REACH SVHC=Unknown, RoHS=Yes, RoHS Compliant=Yes, Series=WE-CBF, Stock 1=97012, Supplier 1=Mouser, Termination=SMD/SMT, Weight=0.000388oz, Width=0.047inch
LED1: library part CMP-1426-00011-1, "SMD mono-color Chip LED, WL-SMCW, Red", Color=Red, Manufacturer="Wuerth Elektronik", ComponentLink1Description="Manufacturer URL", ComponentLink1URL=http://www.we-online.com, ComponentLink2Description=Datasheet, ComponentLink2URL=http://katalog.we-online.com/led/datasheet/150080RS75000.pdf, PackageReference=0805_A, PartNumber=150080RS75000
R1: "Res Thick Film 0603 20 Ohm 1% 0.25W(1/4W) ±100ppm/C Sulfur Resistant Pad SMD Automotive T/R", Manufacturer=Panasonic, Manufacturer Part Number=ERJ-UP3F20R0V, Supplier Part Number 1=667-ERJ-UP3F20R0V, Category="Chip SMD Resistors", LatestRevisionDate=17-Jul-2002, LatestRevisionNote="Re-released for DXP Platform.", PackageDescription="Axial Device, Thru-Hole; 2 Leads; 0.4 in Pin Spacing", PackageReference=AXIAL-0.4, Pricing 1="1=0.24000, 10=0.21000, 50=0.21000, 100=0.08300, 1000=0.03500, 10000=0.02800 (USD)", Published=8-Jun-2000, Publisher="Altium Limited", RoHS=No, Stock 1=891, Supplier 1=Mouser
R2 R3 R4 R6 R8 R10 R?: "Res Thick Film 0603 10K Ohm 1% 0.25W(1/4W) ±100ppm/C Sulfur Resistant Pad SMD Automotive T/R", Manufacturer=Panasonic, Manufacturer Part Number=ERJ-UP3F1002V, Supplier Part Number 1=667-ERJ-UP3F1002V, Category="Chip SMD Resistors", LatestRevisionDate=17-Jul-2002, LatestRevisionNote="Re-released for DXP Platform.", PackageDescription="Axial Device, Thru-Hole; 2 Leads; 0.4 in Pin Spacing", PackageReference=AXIAL-0.4, Pricing 1="1=0.27000, 10=0.21000, 50=0.21000, 100=0.08300, 1000=0.03500, 10000=0.02800 (USD)", Published=8-Jun-2000, Publisher="Altium Limited", RoHS=No, Supplier 1=Mouser
R5: "Res Thick Film 0603 18K Ohm 1% 0.25W(1/4W) ±100ppm/C Sulfur Resistant Pad SMD Automotive T/R", Manufacturer=Panasonic, Manufacturer Part Number=ERJ-UP3F1802V, Supplier Part Number 1=667-ERJ-UP3F1802V, Category="Chip SMD Resistors", LatestRevisionDate=17-Jul-2002, LatestRevisionNote="Re-released for DXP Platform.", PackageDescription="Axial Device, Thru-Hole; 2 Leads; 0.4 in Pin Spacing", PackageReference=AXIAL-0.4, Pricing 1="1=0.26000, 10=0.22100, 50=0.22100, 100=0.08600, 1000=0.03600, 10000=0.03000 (USD)", Published=8-Jun-2000, Publisher="Altium Limited", RoHS=No, Stock 1=471, Supplier 1=Mouser
R7: "Res Thick Film 0603 47 Ohm 5% 0.25W(1/4W) ±200ppm/C Sulfur Resistant Pad SMD Automotive T/R", Manufacturer=Panasonic, Manufacturer Part Number=ERJ-UP3J470V, Supplier Part Number 1=667-ERJ-UP3J470V, LatestRevisionDate=17-Jul-2002, LatestRevisionNote="Re-released for DXP Platform.", PackageDescription="Axial Device, Thru-Hole; 2 Leads; 0.4 in Pin Spacing", PackageReference=AXIAL-0.4, Pricing 1="1=0.18000, 10=0.15000, 50=0.15000, 100=0.05800, 1000=0.03500, 10000=0.01800 (USD)", Published=8-Jun-2000, Publisher="Altium Limited", RoHS=No, Stock 1=8898, Supplier 1=Mouser
R9: "Res Thick Film 0603 1K Ohm 1% 0.25W(1/4W) ±100ppm/C Sulfur Resistant Pad SMD Automotive T/R", Manufacturer=Panasonic, Manufacturer Part Number=ERJ-UP3F1001V, Supplier Part Number 1=667-ERJ-UP3F1001V, Category="Chip SMD Resistors", LatestRevisionDate=17-Jul-2002, LatestRevisionNote="Re-released for DXP Platform.", PackageDescription="Axial Device, Thru-Hole; 2 Leads; 0.4 in Pin Spacing", PackageReference=AXIAL-0.4, Pricing 1="1=0.25000, 10=0.21000, 50=0.21000, 100=0.08800, 1000=0.04000, 10000=0.02800 (USD)", Published=8-Jun-2000, Publisher="Altium Limited", RoHS=No, Supplier 1=Mouser
R11: "Res Thick Film 0603 390K Ohm 1% 0.25W(1/4W) ±100ppm/C Sulfur Resistant Pad SMD Automotive T/R", Manufacturer=Panasonic, Manufacturer Part Number=ERJ-UP3F3903V, Supplier Part Number 1=667-ERJ-UP3F3903V, Category="Chip SMD Resistors", LatestRevisionDate=17-Jul-2002, LatestRevisionNote="Re-released for DXP Platform.", PackageDescription="Axial Device, Thru-Hole; 2 Leads; 0.4 in Pin Spacing", PackageReference=AXIAL-0.4, Pricing 1="1=0.26000, 10=0.22100, 50=0.22100, 100=0.08600, 1000=0.03600, 10000=0.03000 (USD)", Published=8-Jun-2000, Publisher="Altium Limited", RoHS=No, Stock 1=3827, Supplier 1=Mouser
S1: "Switch Slide DPDT 300MA 6V", Color=Silver, Current Rating=300mA, Manufacturer="Wurth Electronics", Max Operating Temperature=85°C, Min Operating Temperature=-40°C, Operating Force=200gf, Supplier Part Number 1=710-452403012014, Voltage Rating (DC)=6V, Actuator Length=1.2mm, Actuator Material="Polymer,Liquid Crystal Polymer", Actuator Type=Standard, ComponentLink1Description=https://katalog.we-online.de/em/datasheet/452403012014.pdf?src-supplier=Digi-Key, ComponentLink1URL=https://katalog.we-online.de/em/datasheet/452403012014.pdf?src-supplier=Digi-Key, Contact Material="Copper Alloy", Contact Plating=Silver, Contact Style=Non-Shorting, Manufacturer Part Number=452403012014, Mount="Surface Mount", Packaging="Tape and Reel", Pricing 1="1=2.51000, 10=2.51000, 50=2.51000, 100=2.10000, 1000=1.69000, 10000=1.50000 (USD)", RoHS=Yes, RoHS Compliant=Yes, Stock 1=5074, Supplier 1=Mouser, Switch Function=On-On, Switch Travel=2mm, Termination=SMD/SMT, Throw Configuration=DPDT
S2: "Switch Tactile N.O. SPST Button Gull Wing 0.05A 12VDC 3.43N SMD T/R", Case/Package=SMD/SMT, Contact Current Rating=50mA, Contact Resistance=100mR, Insulation Resistance=100MR, Manufacturer="Alps Electric", Manufacturer_Name=ALPS, Max Operating Temperature=85°C, Max Voltage Rating (DC)=12V, Min Operating Temperature=-30°C, Mouser2 Part Number=688-SKQGAKE010, Operating Force=3.43N, Actuator Length=1.5mm, Actuator Type=STEM, Category="Tactile Switches", ComponentLink1Description=https://datasheet.ciiva.com/7573/78970-7573282.pdf?src-supplier=Newark, ComponentLink1URL=https://datasheet.ciiva.com/7573/78970-7573282.pdf?src-supplier=Newark, ComponentLink2Description=https://datasheet.ciiva.com/16156/skqg-16156118.pdf?src-supplier=Onlinecomponents.com, ComponentLink2URL=https://datasheet.ciiva.com/16156/skqg-16156118.pdf?src-supplier=Onlinecomponents.com, ComponentLink3Description=https://datasheet.ciiva.com/5283/skqg-180836-5283912.pdf?src-supplier=Mouser, ComponentLink3URL=https://datasheet.ciiva.com/5283/skqg-180836-5283912.pdf?src-supplier=Mouser, ComponentLink4Description=https://datasheet.ciiva.com/18233/getdatasheetpartid-652065-18233082.pdf?src-supplier=Verical, ComponentLink4URL=https://datasheet.ciiva.com/18233/getdatasheetpartid-652065-18233082.pdf?src-supplier=Verical, Contact Plating=Silver, Current Rating=50mA, Datasheet Link=https://componentsearchengine.com//SKQGAKE010.pdf, Depth=5.2mm, Electrical Life=100000Cycles, Lead Free="Lead Free", Length=6.4mm, Manufacturer Part Number=SKQGAKE010, Manufacturer_Part_Number=SKQGAKE010, Max Current Rating=50mA, Mechanical Life=100000Cycles, Mount="Surface Mount", Mouser2 Price/Stock=https://www.mouser.com/Search/Refine.aspx?Keyword=688-SKQGAKE010, Orientation=Straight, Packaging="Tape and Reel", Pricing 1="1=0.63000, 10=0.60000, 25=0.57800, 50=0.57800, 100=0.50000, 250=0.45600, 500=0.42300, 1000=0.37800, 2000=0.35800, 4000=0.33600, 10000=0.33600 (USD)", Radiation Hardening=No, REACH SVHC="No SVHC", RoHS=Yes, RoHS Compliant=Yes, Series=SKQG, Supplier 1=Mouser, Supplier Part Number 1=688-SKQGAKE010, Termination="Gull Wing", Throw Configuration=SPST, Voltage Rating (DC)=12V, Width=5.2mm
Y1: "Crystal 16.0000MHZ 10PF SMD", Case/Package=SMD/SMT, ESR (Equivalent Series Resistance)=80R, Frequency=16MHz, Frequency Stability=10ppm, Load Capacitance=10pF, Manufacturer=NDK, Max Operating Temperature=70°C, Min Operating Temperature=-20°C, Package Quantity=3000, Supplier Part Number 1=344-NX3225SA16MHZT1, Category=Crystals, ComponentLink1Description=https://datasheet.ciiva.com/860/nx3225sa-16-000000mhz-t1-860715.pdf?src-supplier=Digi-Key, ComponentLink1URL=https://datasheet.ciiva.com/860/nx3225sa-16-000000mhz-t1-860715.pdf?src-supplier=Digi-Key, ComponentLink2Description=https://datasheet.ciiva.com/860/nx3225sa-16-000000mhz-t1-860716.pdf?src-supplier=Digi-Key, ComponentLink2URL=https://datasheet.ciiva.com/860/nx3225sa-16-000000mhz-t1-860716.pdf?src-supplier=Digi-Key, ComponentLink3Description=https://datasheet.ciiva.com/860/nx3225sa-16-000000mhz-t1-860717.pdf?src-supplier=Digi-Key, ComponentLink3URL=https://datasheet.ciiva.com/860/nx3225sa-16-000000mhz-t1-860717.pdf?src-supplier=Digi-Key, Frequency Tolerance=10ppm, Height=0.028inch, Lead Free="Lead Free", Length=0.126inch, Manufacturer Part Number=NX3225SA-16.000000MHZ-T1, Mount="Surface Mount", Packaging="Tape and Reel", Pricing 1="1=0.92000, 10=0.76000, 50=0.76000, 100=0.67100, 500=0.63600, 1000=0.53000, 10000=0.53000 (USD)", RoHS=Yes, Supplier 1=Mouser, Width=0.098inch

## Via types
v1: diameter 0.45, hole 0.2, Top Layer to Bottom Layer, 46 vias
v2: diameter 0.45, hole 0.2, Plane (3V3) to Bottom Layer, 8 vias
v3: diameter 0.45, hole 0.2, Top Layer to Plane (GND), 6 vias
v4: diameter 0.45, hole 0.2, Plane (GND) to Bottom Layer, 5 vias
v5: diameter 0.45, hole 0.2, Top Layer to Plane (3V3), 4 vias

## Nets (pads, with @x,y where several pads share a name; then routed paths per layer and width w, separated by ;. In a path a pad name is that pad's centre, name@x,y a point inside that pad or via, vN(x,y) a via of type N, cw(c..) or ccw(c..) an arc to the next point about the centre after c; other vN are vias at no path point)
3V3: C1.1 C3.2 C6.1 C9.2 C10.2 C11.2 C14.1 IC1.3 IC2.7 IC2.8 IC3.9 IC3.24 IC3.36 IC3.48 J2.10 J3.1 J4.5 J4.7 LED1.2 R3.1 R4.1 R5.1 R6.2 R8.1 R?.1 S1.1 S1.4 | length 51.2
  Top Layer w0.204: LED1.2 3.25,9.7 v5(3.25,8.75) ; R6.2 R8.1 14.325,16.425 v5(15.25,15.5) ; v1(12.5,71.75) J4.5 ; v1(13.5,71.75) J4.7 ; J2.10 15.75,53 v5(16.25,52.5) ; C1.1 18.12,16 18,15.88 18,11 18.25,10.75 18.673,10.75 R5.1 18.754,10.673 18.754,10.25 19,10.004 20.455,10.004 20.575,9.884 IC1.3 v5(21.5,9.5)
  Bottom Layer w0.204: J3.1 2.978,59.553 2.978,61.161 3.25,61.433 v2(3.25,61.5) ; v2(7.75,23.75) 7.75,22.967 C3.2 8.31,22.94 8.5,22.75 IC3.48 ; v2(8.5,15.25) C6.1@9.283,15.25 ; C6.1 C6.1@9.283,15.25 ; v2(9.5,33.75) S1.4 S1.1 ; IC3.36 9.75,16.12 9.63,16 9.37,16 9.25,15.88 9.25,15.283 C6.1@9.283,15.25 ; v1(12.5,71.75) 12.5,70.858 13.292,70.066 13.292,69.588 C10.2 ; v1(13.5,71.75) 14.542,70.708 14.542,69.588 C9.2 ; IC3.9 13.75,24 13.907,24.157 C11.2@13.907,24.75 ; C11.2 C11.2@13.907,24.75 ; v2(14.75,24.75) C11.2@13.907,24.75 ; R3.1 R?.1 R4.1 18.822,57.647 v2(19.798,57.647) ; IC3.24 16.5,17.25 16.69,17.06 C14.1 17.25,17.033 v2(17.25,16.25) ; IC2.7 20.135,39.63 20.255,39.75 v2(20.752,39.75) 21.25,39.75 21.405,39.595 IC2.8
5V: C2.2 D1.5 IC1.4 IC1.6 L1.1 | length 12.7
  Top Layer w0.204: D1.5 12.5,9.62 12.62,9.5 13.768,9.5 14.25,9.981 14.25,10.75 14.605,11.105 L1.1 17.145,11.105 17.5,10.75 17.5,9.5 ; IC1.4 17.5,9.5 ; C2.2 18.62,8.427 18.547,8.5 IC1.6 17.62,8.5 17.5,8.62 17.5,9.5
GND: C1.2 C2.1 C3.1 C4.1 C5.1 C6.2 C9.1 C10.1 C11.1 C12.1 C13.2 C14.2 C15.2 D1.2 IC1.1 IC2.4 IC3.8 IC3.23 IC3.35 IC3.47 IC3.49 J1.4 J1.MH1 J1.MH2 J2.1 J3.3 J3.5 J3.9 J4.6 J4.AMP1 J4.AMP2 J4.BMP1 J4.BMP2 R1.2 R9.1 R10.2 R11.1 S2.1 S2.2 Y1.2 Y1.4 | length 98.5
  Top Layer w0.204: v3(6.5,71.25) J4.AMP1 8.6,70.7 J4.BMP1 ; J1.MH1 9,4.955 J1.4 ; v3(8.5,8.75) 8.5,9.675 R9.1 ; v3(10.5,54.75) 11,54.75 11.25,54.5 J2.1 ; v3(12.5,7.5) D1.2 ; v1(13,71) J4.6 ; J4.BMP2 19.4,70.7 J4.AMP2 v3(21.5,71.25) ; C2.1 19.5,8.908 19.908,8.5 20.575,8.5 v3(21.5,8.5) 21.567,8.5 21.761,8.694 21.769,8.694 22.26,9.185 22.26,13.74 21.75,14.25 R1.2 20.25,14.325 C1.2